# EAGLE board E3-Touch_Sensor_v2 (EAGLE 7.7.0)
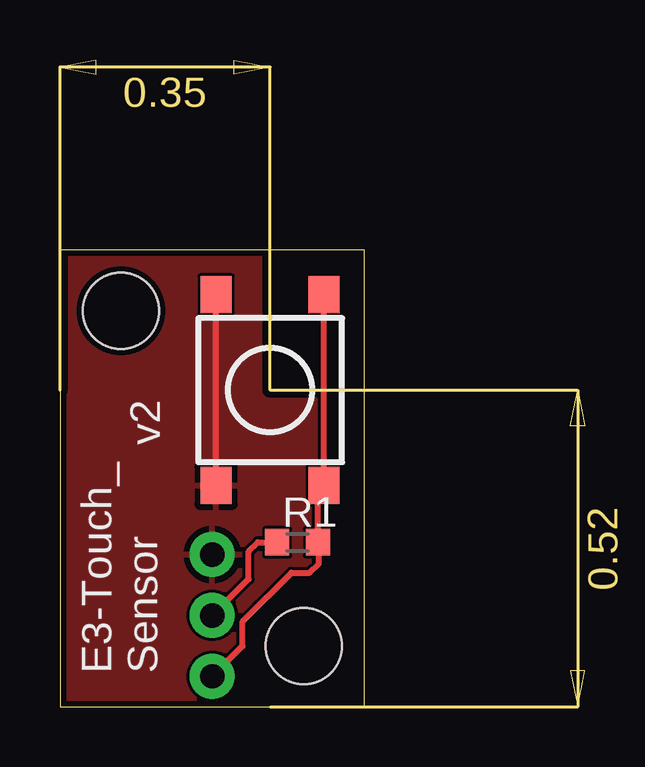
[diagram p0: board, top side]
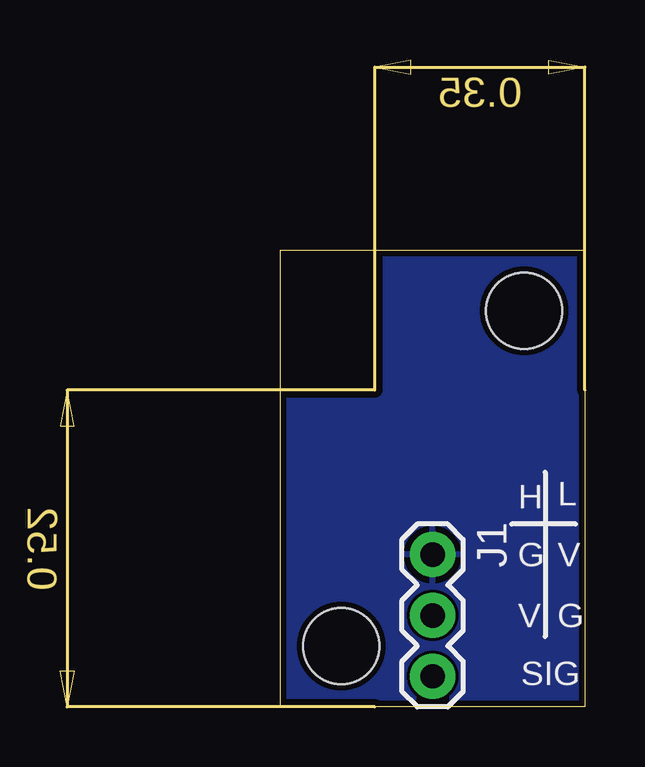
[diagram p1: board, bottom side, seen from below]

Size 12.7 x 19.05 mm. Coordinates in mm from the lower left corner, seen from the top.
Outline: 0,0 12.7,0 12.7,19.05 0,19.05 0,0
Copper layers (1*16): Top 0.035mm / dielectric 1.5mm / Bottom 0.035mm
Design rules "dirt_cheap_dirty_boards.v1": minimum track width 5mil, minimum drill 12mil, track to track 5mil, track to pad 5mil, pad to pad 5mil, via to via 5mil, smd to smd 0mil, copper to edge 10mil, drill to drill 10mil, minimum pad ring 10mil, minimum via ring 6mil, stop-mask expansion 2mil, vias tented up to drill 25mil, thermal gap 10mil
Holes 3.17 mm at 10.16,2.54 2.54,16.51

## Footprints (pad centres in the part's own frame; a part is rotated, then mirrored left to right if it is on the bottom)
1X03 = drill 1.016 pad 1.88: 1 0,0; 2 2.54,0; 3 5.08,0
R0603 = smd 1 x 1.1: 1 -0.85,0; 2 0.85,0
TACTILE_SWITCH_TALL = smd 1.55 x 1.3: A1 -3.975,-2.25; A2 3.975,-2.25; B1 -3.975,2.25; B2 3.975,2.25

## Placement (x,y rotation side)
J1  [1X03]  6.35,6.35 270 bottom
R1  10K  [R0603]  9.91,6.86 0 top
S1  PTS645SM43SMTR92 LFS  [TACTILE_SWITCH_TALL]  8.76,13.21 270 top

## Library data of the parts
J1 = SparkFun-Connectors
R1 = eagle-ltspice; SPICEMODEL: NONE; SPICEPREFIX: R
S1 = SparkFun-Electromechanical; PROD_ID: SWCH-11966

## Nets
GND: J1.1 S1.A2
N$2: J1.3 R1.2 S1.B2
N$3: J1.2 R1.1

## Tracks (layer width: path | path; a pad name or v marks a point on that pad's centre or on a via)
GND
  Top 0.254: S1.A2 6.51,17.24 6.48,17.27
  pour Top: 0,1.27 0,19.05 12.7,19.05 12.7,0 0,0
  pour Bottom: 0,0 0,19.05 12.7,19.05 12.7,0
N$2
  Top 0.254: 11.05,17.14 11.01,17.11 S1.B2 10.76,8.98 R1.2 10.79,6.82 10.79,5.97 10.41,5.59 9.65,5.59 7.62,3.56 7.62,2.54 J1.3
N$3
  Top 0.254: R1.1 8.26,6.86 7.87,6.48 7.87,5.33 J1.2

## Text on the board
tPlace: v2 | E3-Touch_ / Sensor
bPlace: L | H | V | G | G | V | SIG